# EAGLE board hw2 (EAGLE 8.1.0)
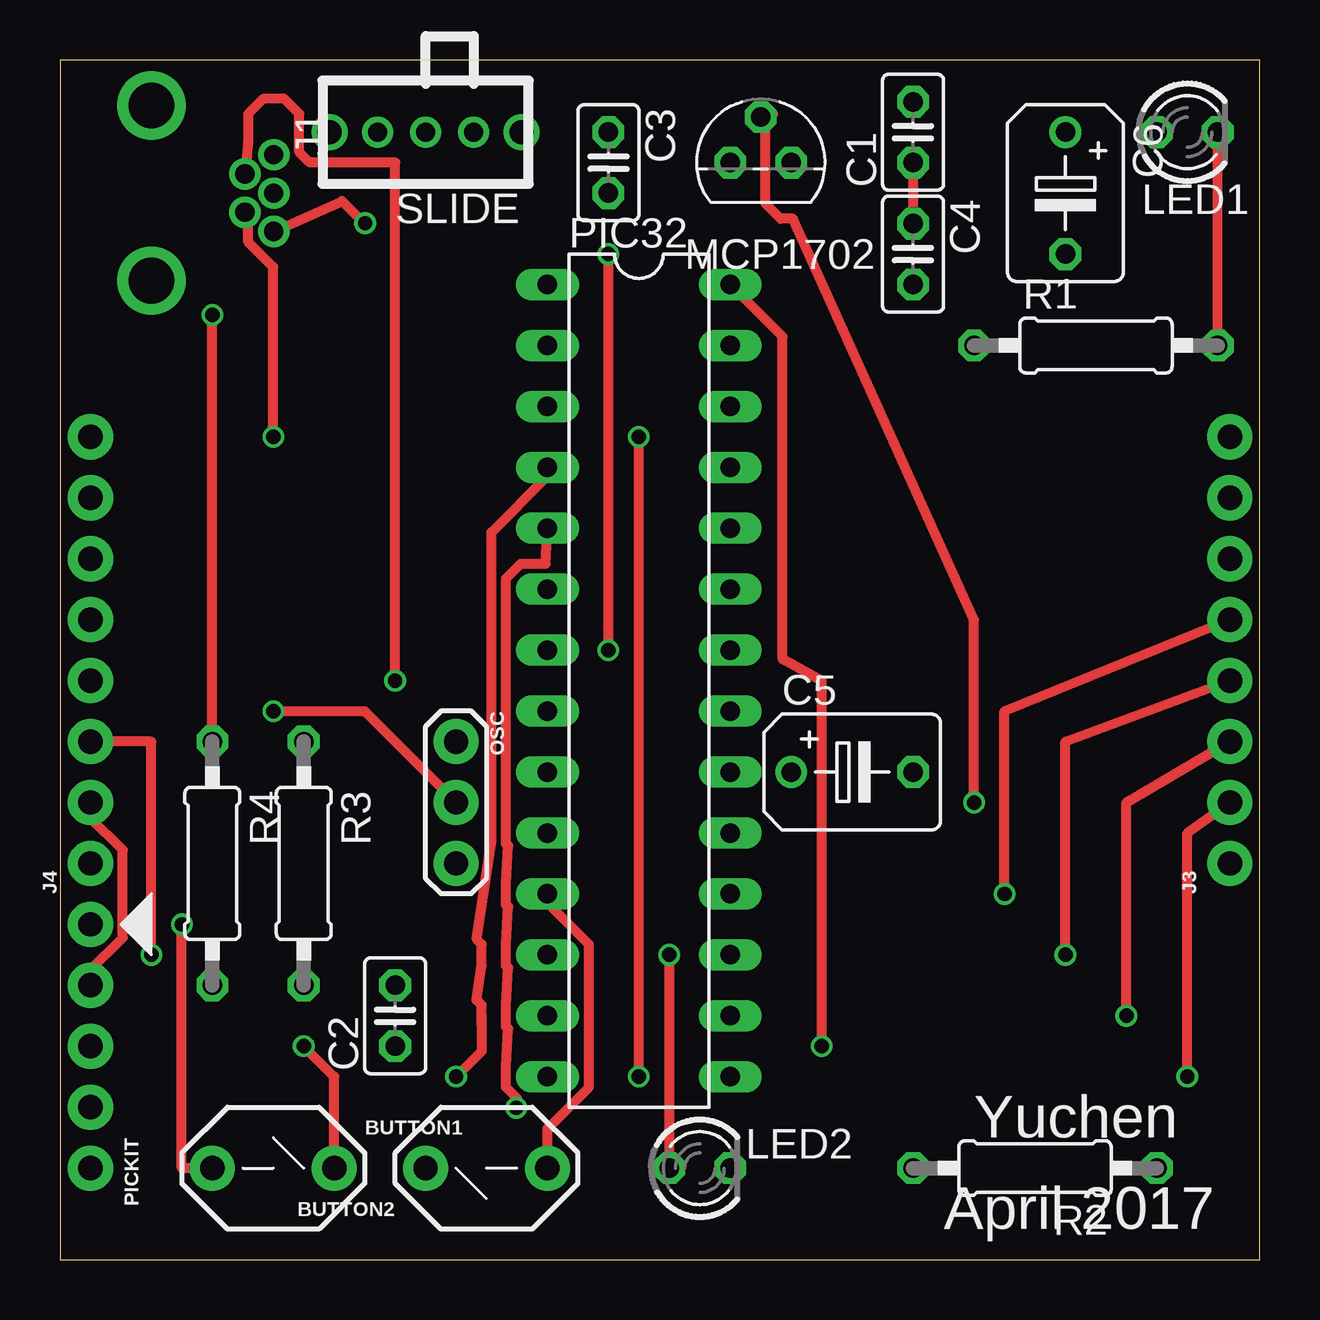
[diagram p0: board, top side]
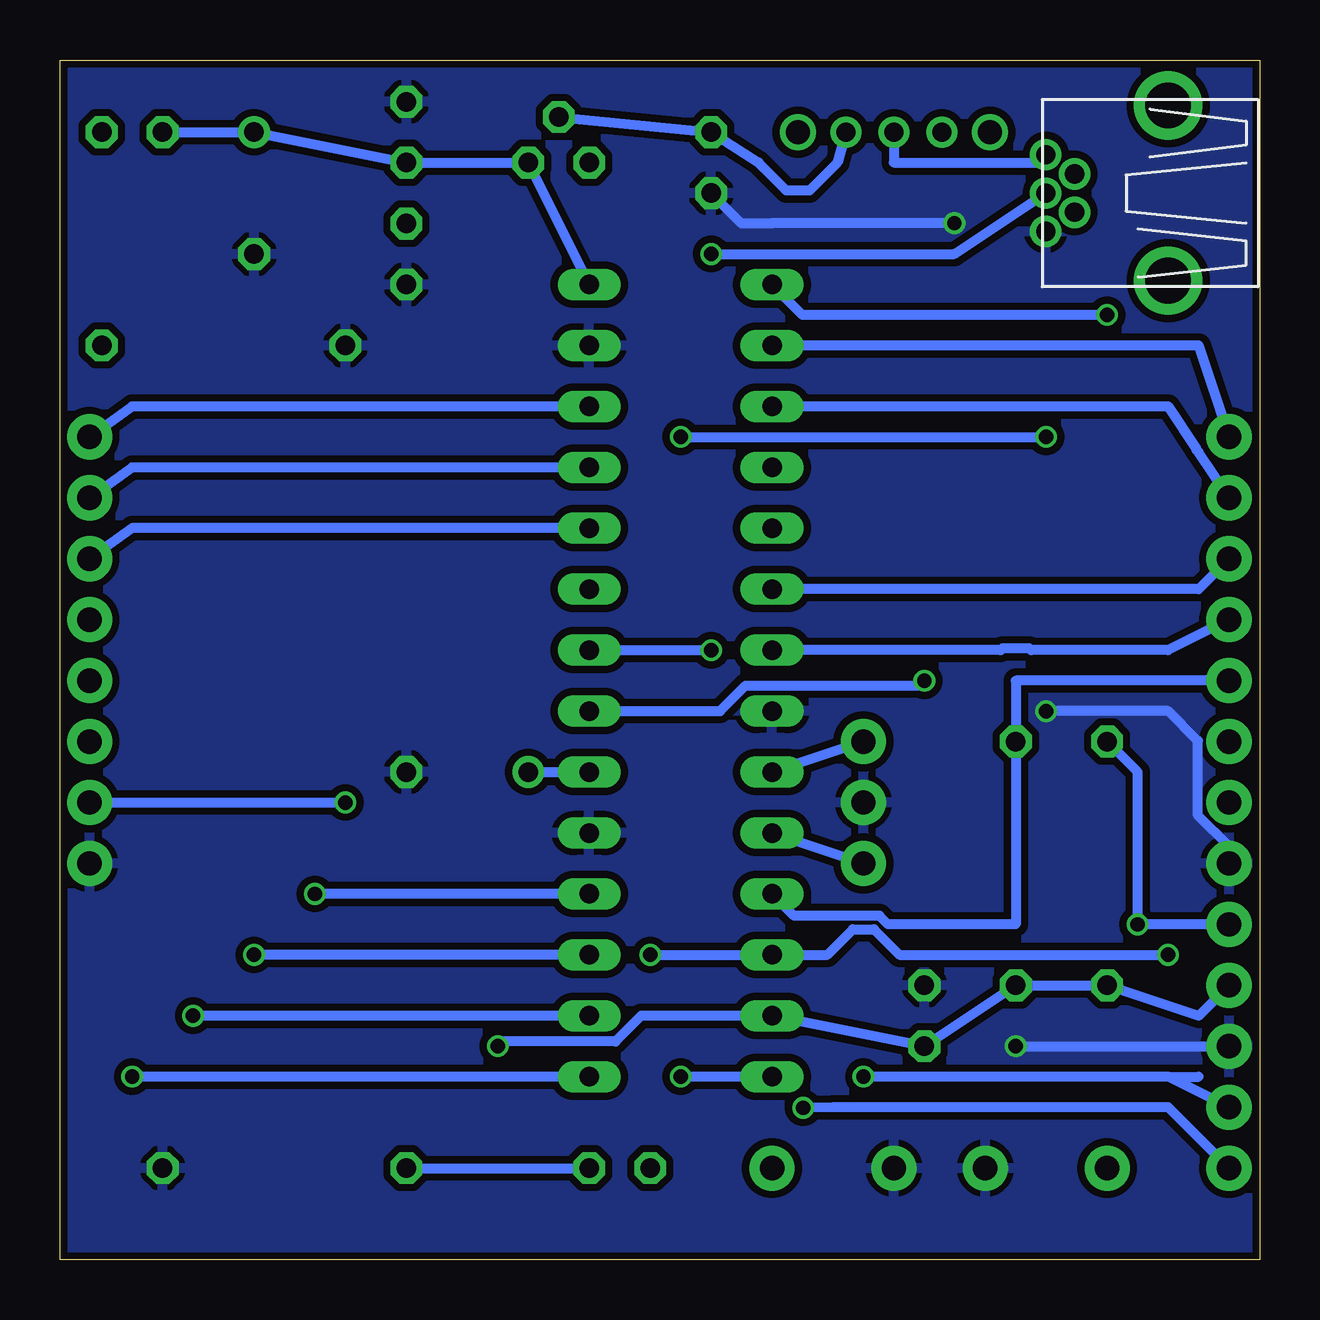
[diagram p1: board, bottom side, seen from below]

Size 50 x 50 mm. Coordinates in mm from the lower left corner, seen from the top.
Outline: 0,0 50,0 50,50 0,50 0,0
Copper layers (1*16): Top 0.035mm / dielectric 1.5mm / Bottom 0.035mm
Design rules "SeeedStudio_2layer_DRU_no_angle_20140221": minimum track width 6mil, minimum drill 12mil, track to track 6mil, track to pad 6mil, pad to pad 6mil, via to via 6mil, smd to smd 0mil, copper to edge 10mil, drill to drill 10mil, minimum pad ring 10mil, minimum via ring 6mil, stop-mask expansion 2mil, vias tented up to drill 100mil, thermal gap 10mil

## Footprints (pad centres in the part's own frame; a part is rotated, then mirrored left to right if it is on the bottom)
PB = drill 1.016 pad 1.88: 1 -2.54,0; 2 2.54,0
C025-025X050 = drill 0.813 octagon: 1 -1.27,0; 2 1.27,0
B45181B = drill 0.813: + -2.54,0 | drill 0.813 octagon: - 2.54,0
USB-MB-H = drill 0.8: D+ 5.1,0; D- 3.9,0.8; GND 5.1,-1.6; ID 3.9,-0.8; VBUS 5.1,1.6 | drill 1.9: P$6 0,-3.65; P$7 0,3.65
1X08 = drill 1.016 pad 1.88: 1 0,0; 2 2.54,0; 3 5.08,0; 4 7.62,0; 5 10.16,0; 6 12.7,0; 7 15.24,0; 8 17.78,0
LED3MM = drill 0.813 octagon: A -1.27,0; K 1.27,0
TO92 = drill 0.813 octagon: 1 -1.27,0; 2 0,1.905; 3 1.27,0
OSC = drill 1.016 pad 1.88: 1 -2.54,0; 2 0,0; 3 2.54,0
DIL28-3 = drill 0.813 long: 1 -16.51,-3.81; 2 -13.97,-3.81; 3 -11.43,-3.81; 4 -8.89,-3.81; 5 -6.35,-3.81; 6 -3.81,-3.81; 7 -1.27,-3.81; 8 1.27,-3.81; 9 3.81,-3.81; 10 6.35,-3.81; 11 8.89,-3.81; 12 11.43,-3.81; 13 13.97,-3.81; 14 16.51,-3.81; 15 16.51,3.81; 16 13.97,3.81; 17 11.43,3.81; 18 8.89,3.81; 19 6.35,3.81; 20 3.81,3.81; 21 1.27,3.81; 22 -1.27,3.81; 23 -3.81,3.81; 24 -6.35,3.81; 25 -8.89,3.81; 26 -11.43,3.81; 27 -13.97,3.81; 28 -16.51,3.81
1X05 = drill 1.016 pad 1.88: 1 0,0; 2 2.54,0; 3 5.08,0; 4 7.62,0; 5 10.16,0
0207/10 = drill 0.813 octagon: 1 -5.08,0; 2 5.08,0
SLIDE = drill 0.8: 1 -2,0; 2 0,0; 3 2,0 | drill 1: P$1 -4,0; P$2 4,0

## Placement (x,y rotation side)
BUTTON1  RESET  [PB]  8.89,3.81 0 top
BUTTON2  USER  [PB]  17.78,3.81 180 top
C1  0.1uF  [C025-025X050]  35.56,46.99 90 top
C2  0.1uF  [C025-025X050]  13.97,10.16 90 top
C3  0.1uF  [C025-025X050]  22.86,45.72 270 top
C4  0.1uF  [C025-025X050]  35.56,41.91 270 top
C5  10uF  [B45181B]  33.02,20.32 0 top
C6  10uF  [B45181B]  41.91,44.45 270 top
J1  USB-MB-H  [USB-MB-H]  3.81,44.45 0 top
J3  CONN_08_01  [1X08]  48.77,16.51 90 top
J4  CONN_08_01  [1X08]  1.27,16.51 90 top
LED1  Red  [LED3MM]  46.99,46.99 0 top
LED2  Green  [LED3MM]  26.67,3.81 0 top
MCP1702  [TO92]  29.21,45.72 0 top
OSC  8MHz  [OSC]  16.51,19.05 270 top
PIC32  [DIL28-3]  24.13,24.13 270 top
PICKIT  [1X05]  1.27,13.97 270 top
R1  330  [0207/10]  43.18,38.1 0 top
R2  330  [0207/10]  40.64,3.81 180 top
R3  10K  [0207/10]  10.16,16.51 270 top
R4  10K  [0207/10]  6.35,16.51 270 top
SLIDE  [SLIDE]  15.24,46.99 0 top

## Library data of the parts
BUTTON1 BUTTON2 C1-C6 J1 J3 J4 LED1 LED2 MCP1702 OSC PIC32 PICKIT R1-R4 SLIDE = HW2LIB

## Nets
3V3: PIC32.23
+3V3: C1.1 C2.1 C4.1 C6.+ J4.2 LED1.A MCP1702.3 PIC32.13 PIC32.28 PICKIT.2 R3.2 R4.2
+5V: C3.1 J3.2 MCP1702.2 PIC32.15 SLIDE.3
A0: J4.8 PIC32.2
A1: J4.7 PIC32.3
A4/LED: J4.3 LED2.A PIC32.12
B2: J4.6 PIC32.6
B3: J4.5 PIC32.7
B4/USER: BUTTON2.1 J4.4 PIC32.11 R3.1
B7: J3.3 PIC32.16
B8: J3.4 PIC32.17
B9: J3.5 PIC32.18
B13: J3.6 PIC32.24
B14: J3.7 PIC32.25
B15: J3.8 PIC32.26
D+: J1.D+ PIC32.22
D-: J1.D- PIC32.21
GND: BUTTON1.2 BUTTON2.2 C1.2 C2.2 C3.2 C4.2 C5.- C6.- J1.GND J3.1 J4.1 OSC.2 PIC32.8 PIC32.19 PIC32.27 PICKIT.3 R1.1 R2.1
MCLR: BUTTON1.1 PIC32.1 PICKIT.1 R4.1
N$1: J1.VBUS SLIDE.2
N$2: OSC.1 PIC32.9
N$3: LED1.K R1.2
N$4: LED2.K R2.2
N$5: OSC.3 PIC32.10
N$6: C5.+ PIC32.20
PGC: PIC32.5 PICKIT.5
PGD: PIC32.4 PICKIT.4
USBID: J1.ID PIC32.14

## Tracks (layer width: path | path; a pad name or v marks a point on that pad's centre or on a via)
+3V3  (via drill 0.6)
  Top 0.406: PICKIT.2 1.27,12.07 2.62,13.41 2.62,17.07 1.27,18.41 J4.2 | C1.1 C4.1 | v31.75,8.89 31.75,24.11 30.12,25.02 30.12,38.46 PIC32.28
  Bottom 0.406: LED1.A C6.+ C1.1 MCP1702.3 PIC32.28 | PICKIT.2 2.54,10.16 R4.2 R3.2 C2.1 PIC32.13 25.77,10.16 26.84,9.09 31.55,9.09 v31.75,8.89
+5V  (via drill 0.6)
  Top 0.406: v46.99,7.62 46.99,17.78 J3.2 | v38.1,19.05 38.1,26.67 30.55,43.38 30.04,43.38 29.41,44.01 29.41,47.43 29.73,47.75 MCP1702.2
  Bottom 0.406: SLIDE.3 17.6,45.72 18.76,44.56 19.72,44.56 20.88,45.72 C3.1 MCP1702.2 | PIC32.15 v46.99,7.62 | J3.2 v38.1,19.05
A0
  Bottom 0.406: J4.8 2.54,38.1 PIC32.2
A1
  Bottom 0.406: J4.7 2.54,33.66 2.62,33.73 2.62,33.77 3.81,35.56 PIC32.3
A4/LED  (via drill 0.6)
  Top 0.406: LED2.A v25.4,12.7 | v3.81,12.7 3.81,21.59 J4.3
  Bottom 0.406: v25.4,12.7 PIC32.12 18.02,12.7 16.95,13.77 16.07,13.77 15,12.7 v3.81,12.7
B2
  Bottom 0.406: J4.6 2.54,27.94 PIC32.6
B3
  Bottom 0.406: J4.5 3.81,25.4 9.53,25.4 9.6,25.48 10.72,25.48 10.79,25.4 PIC32.7
B4/USER
  Top 0.406: BUTTON2.1 20.32,5.45 22.05,7.18 22.05,13.14 20.32,14.87 PIC32.11
  Bottom 0.406: J4.4 10.16,24.13 R3.1 10.16,13.97 15.48,13.97 15.84,14.33 19.41,14.33 PIC32.11
B7  (via drill 0.6)
  Top 0.406: v44.45,10.16 44.45,19.05 J3.3
  Bottom 0.406: PIC32.16 v44.45,10.16
B8  (via drill 0.6)
  Top 0.406: v41.91,12.7 41.91,21.59 J3.4
  Bottom 0.406: PIC32.17 v41.91,12.7
B9  (via drill 0.6)
  Top 0.406: v39.37,15.24 39.37,22.86 J3.5
  Bottom 0.406: PIC32.18 v39.37,15.24
B13
  Bottom 0.406: PIC32.24 46.99,30.48 J3.6
B14
  Bottom 0.406: PIC32.25 46.99,33.02 J3.7
B15
  Bottom 0.406: PIC32.26 46.99,35.56 J3.8
D+  (via drill 0.6)
  Top 0.406: v22.86,25.4 v22.86,41.91
  Bottom 0.406: PIC32.22 v22.86,25.4 | v22.86,41.91 12.72,41.91 J1.D+
D-  (via drill 0.6)
  Top 0.406: v13.97,24.13 13.97,45.72 10.41,45.72 9.97,46.16 9.97,47.76 9.35,48.38 8.47,48.38 7.85,47.76 7.85,46.66 J1.D-
  Bottom 0.406: PIC32.21 22.49,22.86 21.42,23.93 14.17,23.93 v13.97,24.13
GND  (via drill 0.6)
  Top 0.406: J1.GND 11.76,44.12 12.7,43.18 v12.72,43.2 | BUTTON1.2 11.43,7.62 v10.16,8.89 | v8.89,22.86 12.7,22.86 OSC.2
  Bottom 0.406: v12.72,43.2 20.3,43.2 20.32,43.18 21.59,43.18 C3.2 | v10.16,8.89 PICKIT.3 | J4.1 1.27,17.22 2.56,18.51 2.56,21.61 3.81,22.86 v8.89,22.86
  pour Bottom (isolate 0.305): 0,49.53 0,0 49.53,0 49.53,49.53
MCLR  (via drill 0.6)
  Top 0.406: R4.1 v6.35,39.37 | BUTTON1.1 5.08,3.81 v5.08,13.97
  Bottom 0.406: PICKIT.1 v5.08,13.97 5.08,20.32 R4.1 | v6.35,39.37 19.05,39.37 PIC32.1
N$1
  Bottom 0.406: SLIDE.2 15.24,45.72 9.24,45.72 J1.VBUS
N$2
  Bottom 0.406: PIC32.9 OSC.1
N$3
  Top 0.406: R1.2 LED1.K
N$4
  Bottom 0.406: R2.2 LED2.K
N$5
  Bottom 0.406: OSC.3 PIC32.10
N$6
  Bottom 0.406: C5.+ PIC32.20
PGC  (via drill 0.6)
  Top 0.406: v19.02,6.32 19.05,6.73 18.59,7.18 18.59,8.06 18.68,9.63 18.59,9.72 18.59,10.6 18.68,12.17 18.59,12.26 18.59,13.14 18.68,14.71 18.59,14.8 18.59,15.68 18.68,17.25 18.59,17.34 18.59,28.38 19.22,29.01 20.24,29.01 PIC32.5
  Bottom 0.406: PICKIT.5 3.81,6.35 17.78,6.35 v19.02,6.32
PGD  (via drill 0.6)
  Top 0.406: 17.58,9.72 17.58,10.16 | 17.58,10.16 17.58,10.6 17.36,10.82 17.58,12.26 17.58,13.14 17.37,13.35 17.98,17.44 17.98,30.31 20.25,32.58 PIC32.4 | 17.58,10.16 17.58,8.69 v16.51,7.62
  Bottom 0.406: PICKIT.4 3.81,7.62 | 3.81,7.62 v16.51,7.62 | 3.81,7.62 2.54,7.62
USBID  (via drill 0.6)
  Top 0.406: v24.13,7.62 v24.13,34.29 | v8.89,34.29 8.89,41.37 7.85,42.41 7.85,43.51 J1.ID
  Bottom 0.406: PIC32.14 v24.13,7.62 | v24.13,34.29 v8.89,34.29

## Text on the board
tPlace: Yuchen | April 2017